# Altium PCB POV-Teensy.PcbDoc
Units mm, origin at the board's own origin, x right, y up, seen from the top; angles counter-clockwise.
Board outline 33.53 x 38.99 mm, 2 copper layers (Top Layer, Bottom Layer); 20 components, 0 nets, 89 pads, 16 vias.
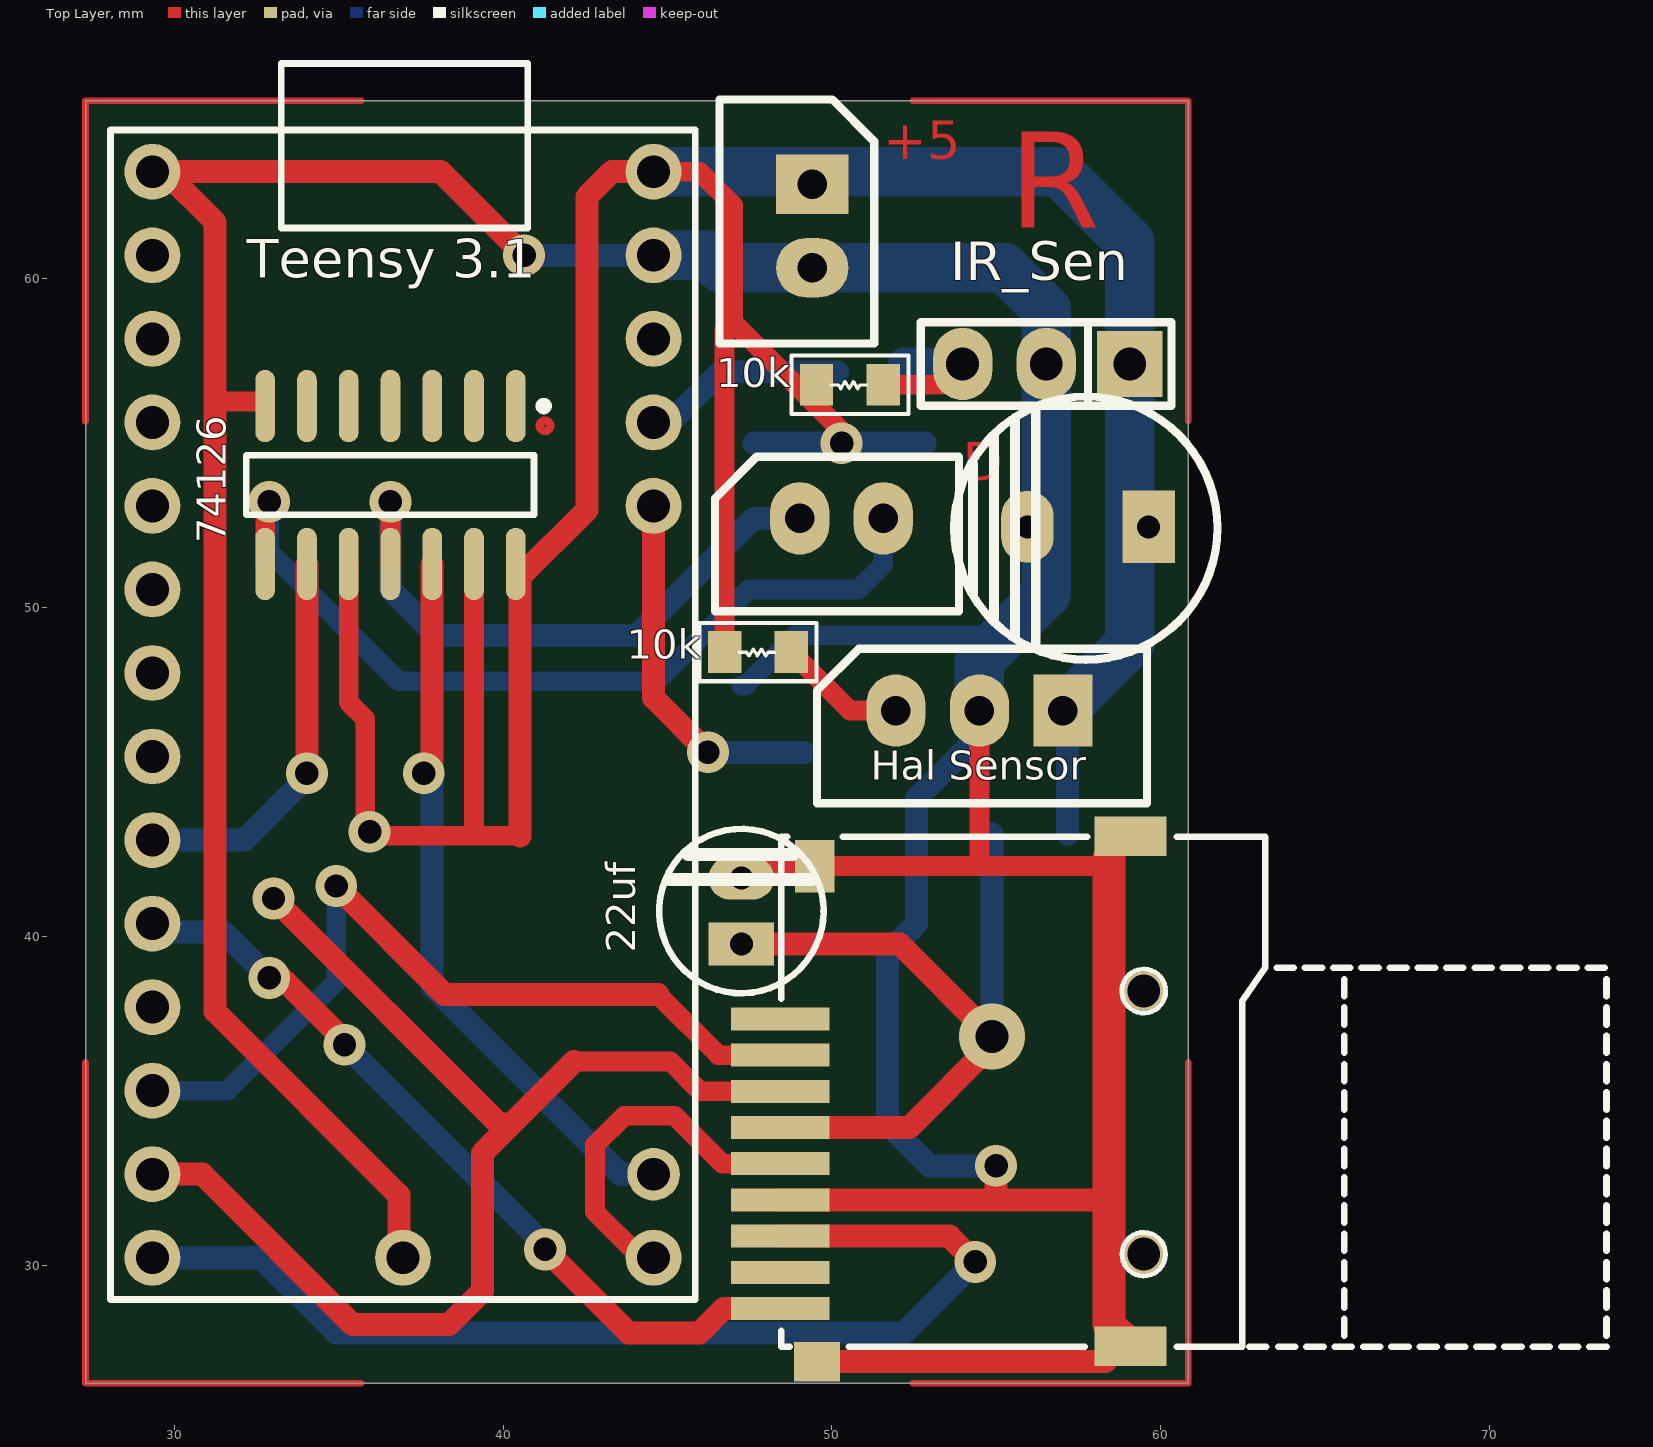
[diagram p0: Top Layer view]
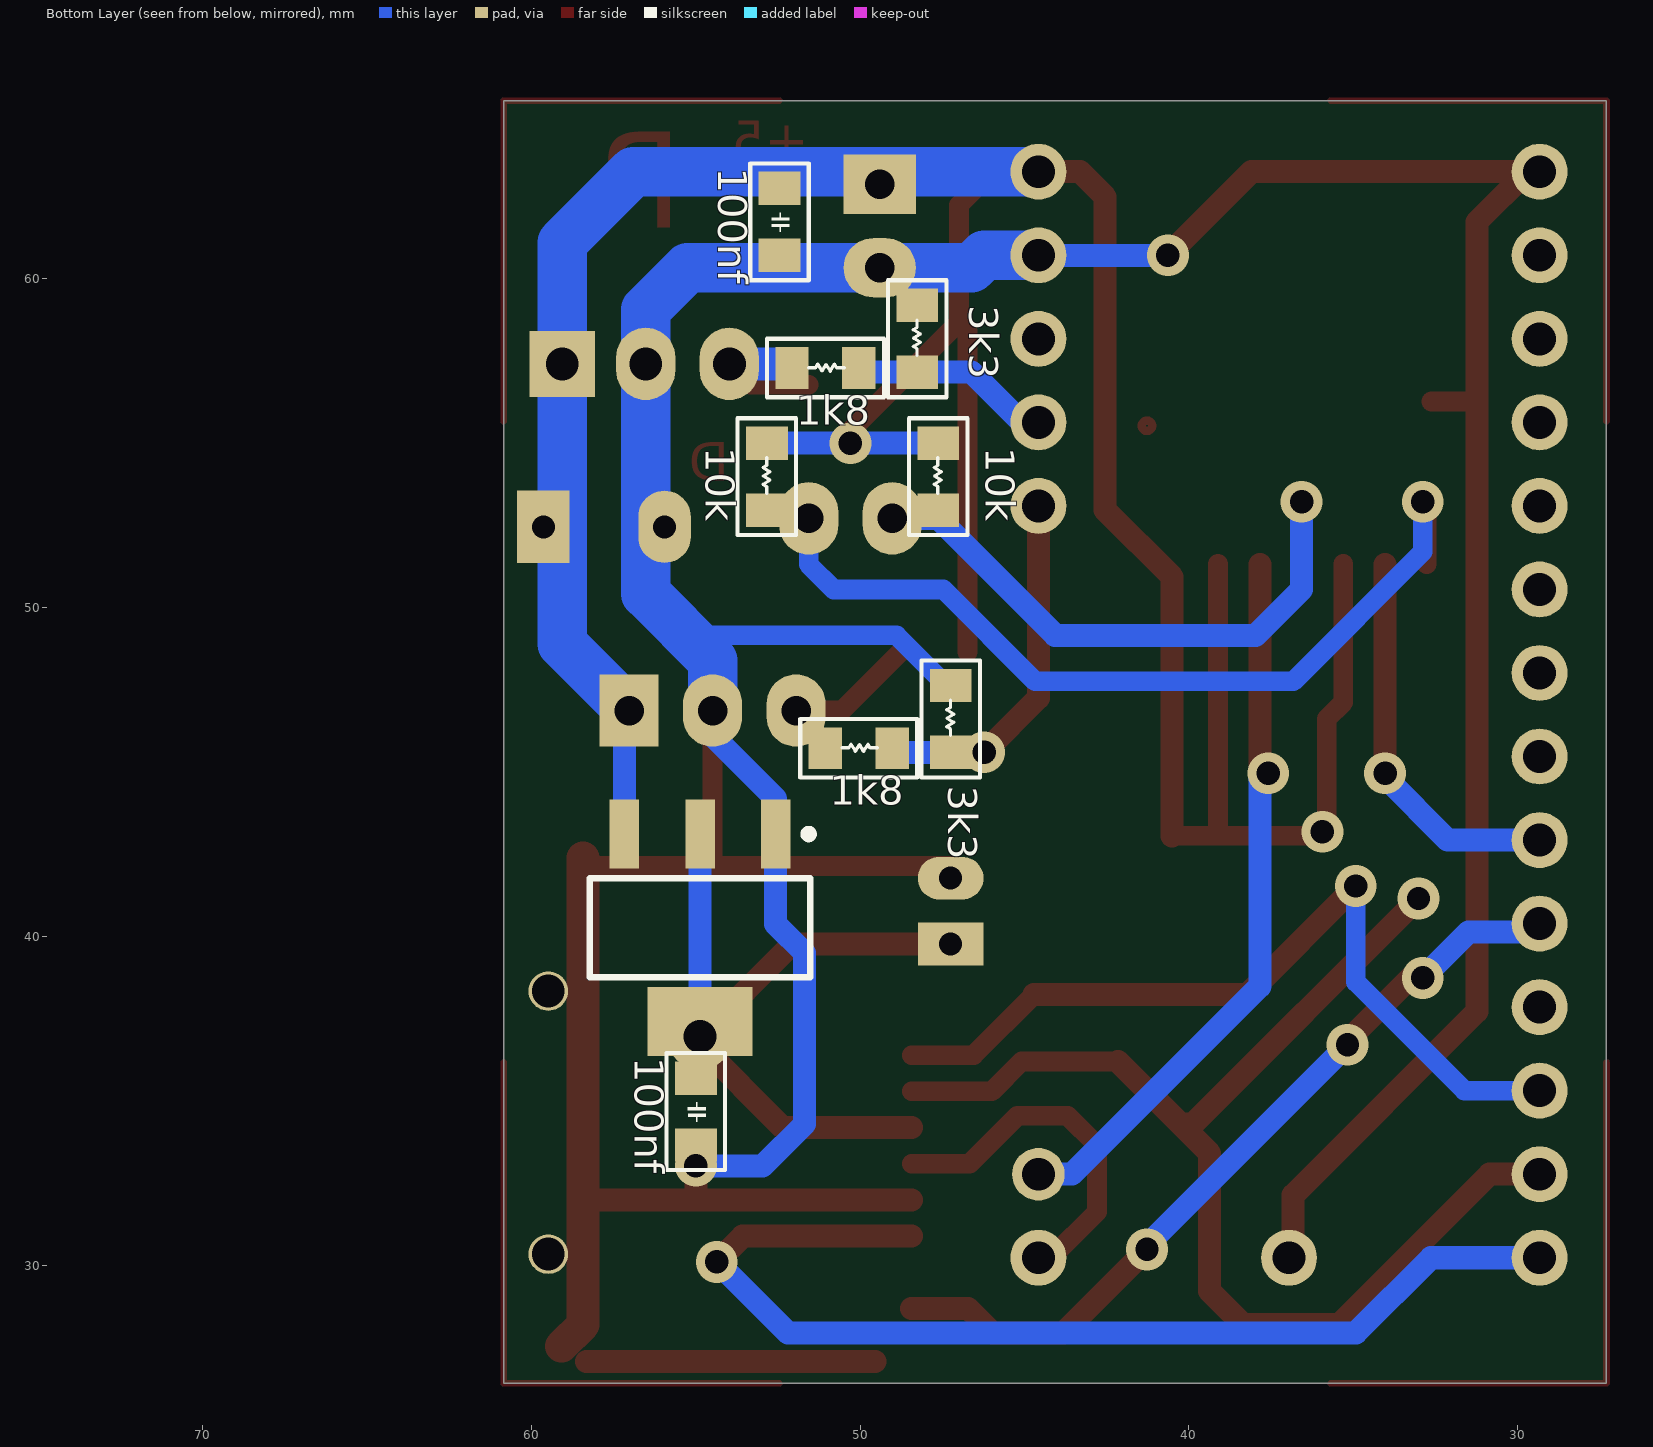
[diagram p1: Bottom Layer view, seen from below]

## Layer stack, top to bottom
Top Solder: solder mask 0.0102, Solder Resist, Dk 3.5
Top Layer: signal copper 0.0356
Dielectric 1: dielectric 0.32, FR-4, Dk 4.8
Bottom Layer: signal copper 0.0356
Bottom Solder: solder mask 0.0102, Solder Resist, Dk 3.5

## Board outline
27.305,26.416 27.305,65.405 60.833,65.405 60.833,26.416

## Design rules (kind name [scope] priority, off if disabled: settings)
Clearance [All] p1: gap=0.254
PolygonConnect [All] p1: connectstyle=Relief reliefconductorwidth=0.254 reliefentries=4 polygonreliefangle="90 Angle" airgapwidth=0.254
RoutingVias [All] p1: holewidth=0.711 width=1.27 viastyle="Through Hole" minholewidth=0.711 minwidth=1.27 maxholewidth=0.711 maxwidth=1.27
SolderMaskExpansion [All] p1: expansion=0.102
Width [All] p1: maxlimit=0.254 minlimit=0.254 preferedwidth=0.254
30 further rules are at their usual default settings.

## Components (designator, comment, footprint, x,y, rotation, side; value= is the part's Value field where it differs from the comment)
1k8 "Comment" "Res SMD 0805" 51.054,45.72 r0 bottom
1k8 "Comment" "Res SMD 0805" 52.07,57.277 r0 bottom
3k3 "Comment" "Res SMD 0805" 47.244,45.593 r270 bottom
3k3 "Comment" "Res SMD 0805" 48.26,57.15 r270 bottom
10k "Comment" "Res SMD 0805" 52.832,52.959 r270 bottom
10k "Comment" "Res SMD 0805" 47.625,52.959 r270 bottom
10k "Comment" "Res SMD 0805" 48.768,48.641 r0 top
10k "Comment" "Res SMD 0805" 51.562,56.769 r0 top
22uf "Comment" "CAP 5MM" 47.244,40.767 r270 top
100nf "Comment" "CAP SMD 0805" 52.451,60.706 r90 bottom
100nf "Comment" "CAP SMD 0805" 54.991,33.655 r90 bottom
74126 "Comment" SO-14 36.576,53.721 r270 top
"Hal Sensor" "Comment" "Pin gerd 3pin" 54.483,46.863 r90 top
IR_Sen "Comment" "HEADER 3" 59.055,57.404 r0 top
? "Comment" "Teensy 3.1" 36.957,46.736 r0 top
? "Comment" "Pin gerd 2pin"#1 50.292,52.705 r90 top
? "Comment" "Pin gerd 2pin"#2 49.403,61.595 r0 top
? "Comment" MMC-MicroSD 54.229,35.052 r90 top
? "Comment" "REG-AMS1117 3.3V SMD" 54.864,40.259 r180 top
? "Comment" "CAP 8MM" 57.785,52.451 r270 top

## Footprints (in the part's own frame and the unit in brackets; to place one, negate y for a bottom-side part, rotate by r counter-clockwise, add the part's x,y. Pads: shape width x height; smd on the part's side, far side on the other; paste and mask are expansions set on the pad)
"CAP 5MM" [mm]
  oval 1.3x2 hole 0.7: 1(-1,0)
  rect 1.3x2 hole 0.7: 2(1,0)
  silkscreen extent -2.5,-2.5 2.5,2.5
"CAP 8MM" [mm]
  rect 2.2x1.6 hole 0.7: 1(0,1.841)
  oval 2.2x1.6 hole 0.7: 2(0,-1.841)
  silkscreen extent -3.96,-4.06 4.04,3.94
"CAP SMD 0805" [mil]
  rect 40x50 smd: 1(0,0) 2(80,0)
  silkscreen extent -30,-35 110,35
"HEADER 3" [mm]
  oval 1.8x2.2 hole 1: GND(-2.54,0) OUT(-5.08,0)
  rect 2x2 hole 1: VCC(0,0)
  silkscreen extent -6.35,-1.27 1.27,1.27
MMC-MicroSD [mm]
  round 1.2 hole 1: 0(-4.717,-5.25) 0(3.283,-5.25)
  rect 0.7x3 smd: CLK(-1.967,5.8) CS/NSS(1.333,5.8) DI/MOSI(0.233,5.8) DO/MISO(-4.167,5.8) NC(2.433,5.8) NC/NIRQ(-5.267,5.8) SW2(-6.367,5.8) VDD(-0.867,5.8) VSS/GND(-3.067,5.8)
  rect 1.2x1.4 smd: sh1(-7.982,4.686)
  rect 1.2x2.2 smd: sh2(-7.517,-4.85) sh3(7.983,-4.85)
  rect 1.6x1.2 smd: sh4(7.083,4.75)
  silkscreen extent -7.54,-19.32 7.97,5.77
"Pin gerd 2pin"#1 [mm]
  oval 2.2x1.8 hole 0.9: CLK(0,1.27) DATA(0,-1.27)
  silkscreen extent -2.82,-3.57 1.88,3.85
"Pin gerd 2pin"#2 [mm]
  oval 2.2x1.8 hole 0.9: 1(0,-1.27)
  rect 2.2x1.8 hole 0.9: 1(0,1.27)
  silkscreen extent -2.82,-3.57 1.88,3.85
"Pin gerd 3pin" [mm]
  oval 2.2x1.8 hole 0.9: 3(0,2.54) GND(0,0)
  rect 2.2x1.8 hole 0.9: +5v(0,-2.54)
  silkscreen extent -2.82,-5.09 1.88,4.94
"REG-AMS1117 3.3V SMD" [mm]
  rect 0.9x2.1 smd far side: ADJ/GND(2.3,-2.85) IN(-2.3,-2.85) OUT(0,-2.85)
  rect 3.2x2.1 smd far side: OUT(0,2.85)
"Res SMD 0805" [mil]
  rect 40x50 smd: 1(0,0) 2(-80,0)
  silkscreen extent -110,-35 30,35
SO-14 [mm]
  oval 2.2x0.6 smd: 1:C1(-2.4,3.81) 2:IN1(-2.4,2.54) 3:OUT1(-2.4,1.27) 4:C2(-2.4,0) 5:IN2(-2.4,-1.27) 6:OUT2(-2.4,-2.54) 7:GND(-2.4,-3.81) 8:OUT3(2.4,-3.81) 9:IN3(2.4,-2.54) 10:C3(2.4,-1.27) 11:OUT4(2.4,0) 12:IN4(2.4,1.27) 13:C4(2.4,2.54) 14:VCC(2.4,3.81)
  Top Layer circle w0.254: c-1.8,4.7 r0.158
  silkscreen extent -2.52,-4.39 0.9,4.79
"Teensy 3.1" [mm]
  round 1.7 hole 1: 0(-7.62,13.97) 1(-7.62,11.43) 2(-7.62,8.89) 3(-7.62,6.35) 3.3V(7.62,11.43) 4(-7.62,3.81) 5(-7.62,1.27) 6(-7.62,-1.27) 7(-7.62,-3.81) 8(-7.62,-6.35) 9(-7.62,-8.89) 10:SS(-7.62,-11.43) 11:MOSI(-7.62,-13.97) 12:MISO(-7.62,-16.51) 13:SCK(7.62,-16.51) 22/A8(7.62,6.35) 23/A9(7.62,8.89) AGND(7.62,13.97) GND(-7.62,16.51) GND1(0,-16.51) VIN(3.7-5.5v)(7.62,16.51)
  round 1.6 hole 1: 14/A0(7.62,-13.97)
  silkscreen extent -8.89,-17.78 8.89,19.8

## Via types
v1: diameter 1.27, hole 0.711, Top Layer to Bottom Layer, 15 vias
v2: diameter 2, hole 1, Top Layer to Bottom Layer, 1 vias

## Nets (pads, with @x,y where several pads share a name; then routed paths per layer and width w, separated by ;. In a path a pad name is that pad's centre, name@x,y a point inside that pad or via, vN(x,y) a via of type N, cw(c..) or ccw(c..) an arc to the next point about the centre after c; other vN are vias at no path point)
pads on no net: 1k8.1 1k8.2 3k3.1 3k3.2 10k.1 10k.2 22uf.1 22uf.2 100nf.1 100nf.2 74126.1:C1 74126.2:IN1 74126.3:OUT1 74126.4:C2 74126.5:IN2 74126.6:OUT2 74126.7:GND 74126.8:OUT3 74126.9:IN3 74126.10:C3 74126.11:OUT4 74126.12:IN4 74126.13:C4 74126.14:VCC "Hal Sensor.3" "Hal Sensor.+5v" "Hal Sensor.GND" ?.0 ?.1 ?.2 ?.3 ?.3.3V ?.4 ?.5 ?.6 ?.7 ?.8 ?.9 ?.10:SS ?.11:MOSI ?.12:MISO ?.13:SCK ?.14/A0 ?.22/A8 ?.23/A9 ?.ADJ/GND ?.AGND ?.CLK ?.CS/NSS ?.DATA ?.DI/MOSI ?.DO/MISO ?.GND ?.GND1 ?.IN ?.NC ?.NC/NIRQ ?.OUT ?.sh1 ?.sh2 ?.sh3 ?.sh4 ?.SW2 ?.VDD ?.VIN(3.7-5.5v) ?.VSS/GND IR_Sen.GND IR_Sen.OUT IR_Sen.VCC
copper on no net: | length 591.2
  Top Layer w0.2: 27.305,36.163 27.305,26.416 35.687,26.416 ; 27.305,55.658 27.305,65.405 35.687,65.405 ; 52.451,26.416 60.833,26.416 60.833,36.163 ; 52.451,65.405 60.833,65.405 60.833,55.658
  Top Layer w0.6: 31.242,56.261 32.626,56.261 ; 32.766,51.321 v1@32.766,53.086 ; 35.306,51.321 35.306,47.117 35.814,46.609 35.814,43.053 39.116,43.053 ; 36.576,51.321 v1(36.576,53.213) ; 39.116,51.321 39.116,43.053 ; 40.386,43.053 39.116,43.053 ; 42.164,36.195 45.085,36.195 45.995,35.285 48.429,35.285 ; 44.196,30.226 42.799,31.623 42.799,33.655 43.688,34.544 45.212,34.544 46.671,33.085 48.429,33.085 ; 44.577,63.246 45.974,63.246 46.99,62.23 46.99,58.674 ; 44.704,38.227 46.546,36.385 48.429,36.385 ; 46.736,48.641 46.736,58.42 46.99,58.674 ; 47.244,42.135 58.179,42.135 58.42,42.376 ; 48.768,48.641 50.546,46.863 51.943,46.863 ; v1(50.292,54.991) 50.292,55.372 46.99,58.674 ; 51.562,56.769 53.34,56.769 53.975,57.404 ; 54.483,42.291 54.483,46.863
  Top Layer w0.7: 29.337,32.766 30.861,32.766 35.433,28.194 38.354,28.194 39.37,29.21 39.37,33.401 42.164,36.195 ; v1@33.02,38.989 35.179,36.83 v1(35.179,36.703) ; v1(33.02,41.148) 39.878,34.29 40.259,34.29 ; v1(34.036,44.958) 34.036,51.308 ; v1(34.925,41.529) 38.227,38.227 44.704,38.227 ; 36.83,30.353 36.83,32.131 31.242,37.719 31.242,61.722 29.718,63.246 29.337,63.246 38.1,63.246 v1(40.64,60.706) ; v1@37.846,44.958 37.846,51.308 ; 40.513,43.053 40.513,50.927 42.545,52.959 42.545,62.484 43.307,63.246 44.577,63.246 ; v1(41.275,30.48) 43.815,27.94 45.974,27.94 46.719,28.685 48.429,28.685 ; 44.196,30.226 44.577,30.226 ; 44.577,53.086 44.577,47.244 v1(46.228,45.593) ; 47.244,39.767 52.054,39.767 v2(54.864,36.957) ; 48.429,30.885 53.57,30.885 v1(54.356,30.099) ; 48.429,31.985 58.42,31.985 ; 48.429,34.185 52.346,34.185 54.864,36.703 v2@54.864,37.211 ; 49.543,27.07 58.312,27.07 ; 54.991,31.985 v1@54.991,33.274
  Top Layer w1: 58.42,42.376 58.42,28.194 59.079,27.535
  Bottom Layer w0.6: 29.337,35.306 31.623,35.306 34.925,38.608 v1(34.925,41.529) ; v1(32.893,53.213) 32.893,51.689 36.83,47.752 44.672,47.752 47.466,50.546 50.8,50.546 51.562,51.308 51.562,52.705 ; 47.244,47.625 47.371,47.625 48.895,49.149 55.118,49.149
  Bottom Layer w0.7: 29.337,30.226 32.639,30.226 34.925,27.94 52.197,27.94 v1(54.356,30.099) ; 29.337,42.926 32.131,42.926 v1@34.036,44.831 ; 29.591,40.132 31.496,40.132 v1(32.893,38.735) ; v1(35.179,36.703) 41.275,30.607 v1(41.275,30.48) ; v1(36.576,53.213) 36.576,50.546 37.973,49.149 44.069,49.149 47.625,52.705 49.022,52.705 ; v1@37.846,44.958 37.846,38.481 43.561,32.766 44.577,32.766 ; v1(40.64,60.706) 44.577,60.706 ; 45.085,55.626 46.609,57.15 50.165,57.15 ; v1(46.228,45.593) 49.149,45.593 ; 47.625,54.991 52.832,54.991 ; 54.483,46.101 52.564,44.182 52.564,43.109 52.564,40.372 51.689,39.497 51.689,34.29 52.959,33.02 v1(54.991,33.02) ; v2@54.864,37.409 54.864,43.109 ; 57.164,43.109 57.164,46.722
  Bottom Layer w1: 52.197,57.404 53.975,57.404
  Bottom Layer w1.5: 44.577,60.706 46.228,60.706 46.609,60.325 55.245,60.325 56.515,59.055 56.515,50.419 54.483,48.387 54.483,46.863 ; 44.577,63.246 56.896,63.246 59.055,61.087 59.055,48.895 57.023,46.863
  other v1: 35.941,43.18 37.592,44.958

## Other copper
Top Layer:
  text "+5" at 51.562,63.246 h2
  text "R" at 55.372,60.579 h5
  text "D" at 53.975,53.467 h2

## Text inside footprints (layer, text, board x,y; h text height)
?: Top Overlay "Teensy 3.1" at 32.207,59.636 h2